# Altium PCB Side_PCB.PcbDoc
Units mil, origin at the board's own origin, x right, y up, seen from the top; angles counter-clockwise.
Board outline 1345 x 800 mil, 2 copper layers (Top Layer, Bottom Layer); 3 components, 4 nets, 14 pads, 0 vias.
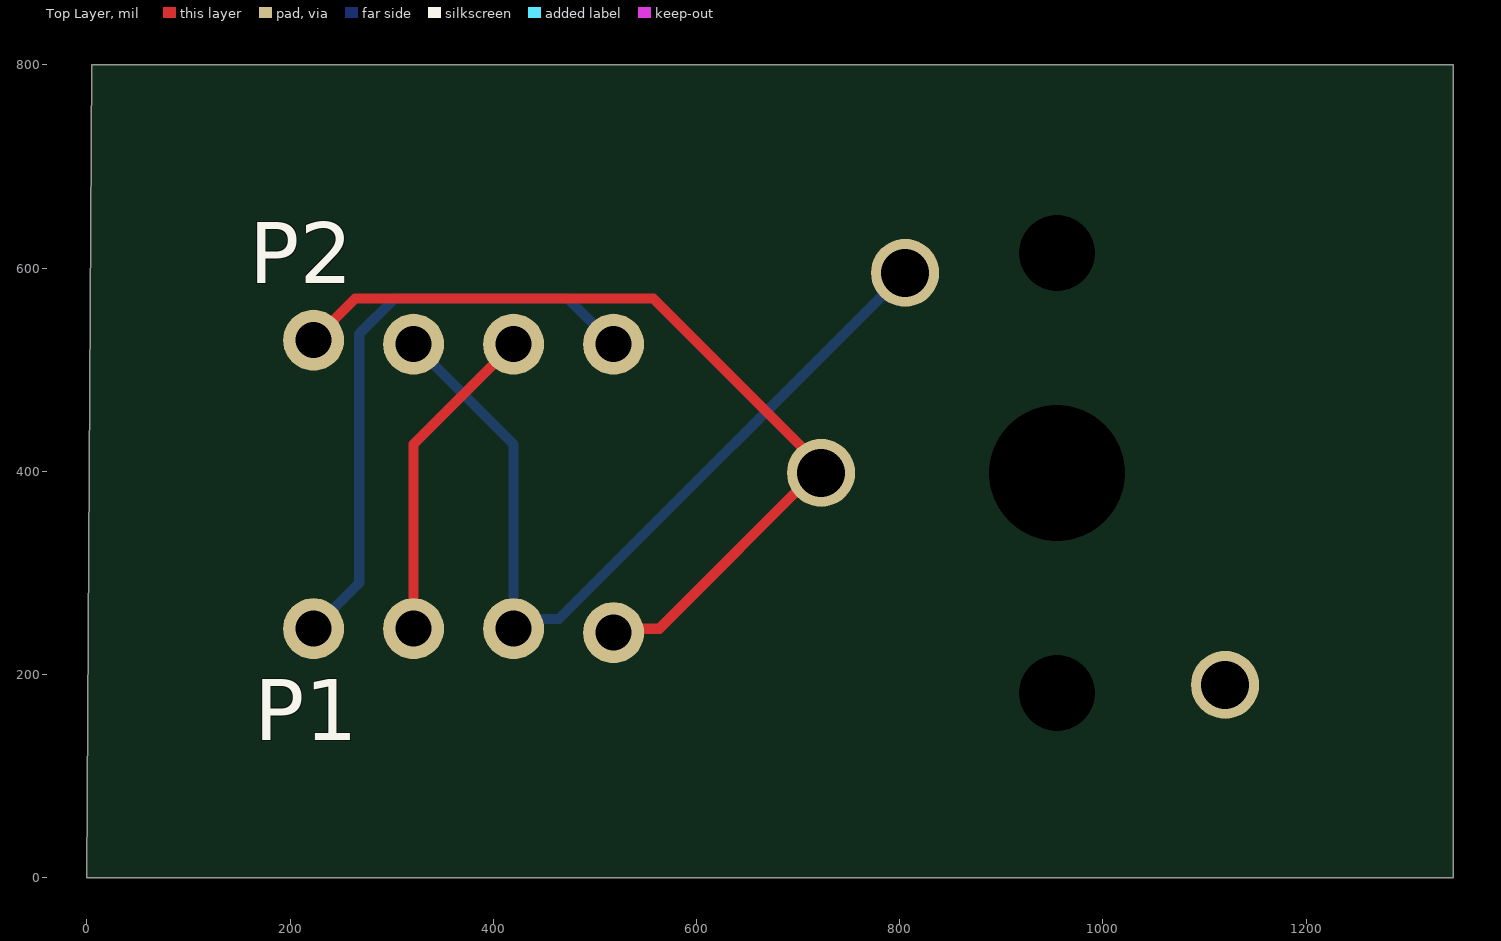
[diagram p0: Top Layer view]
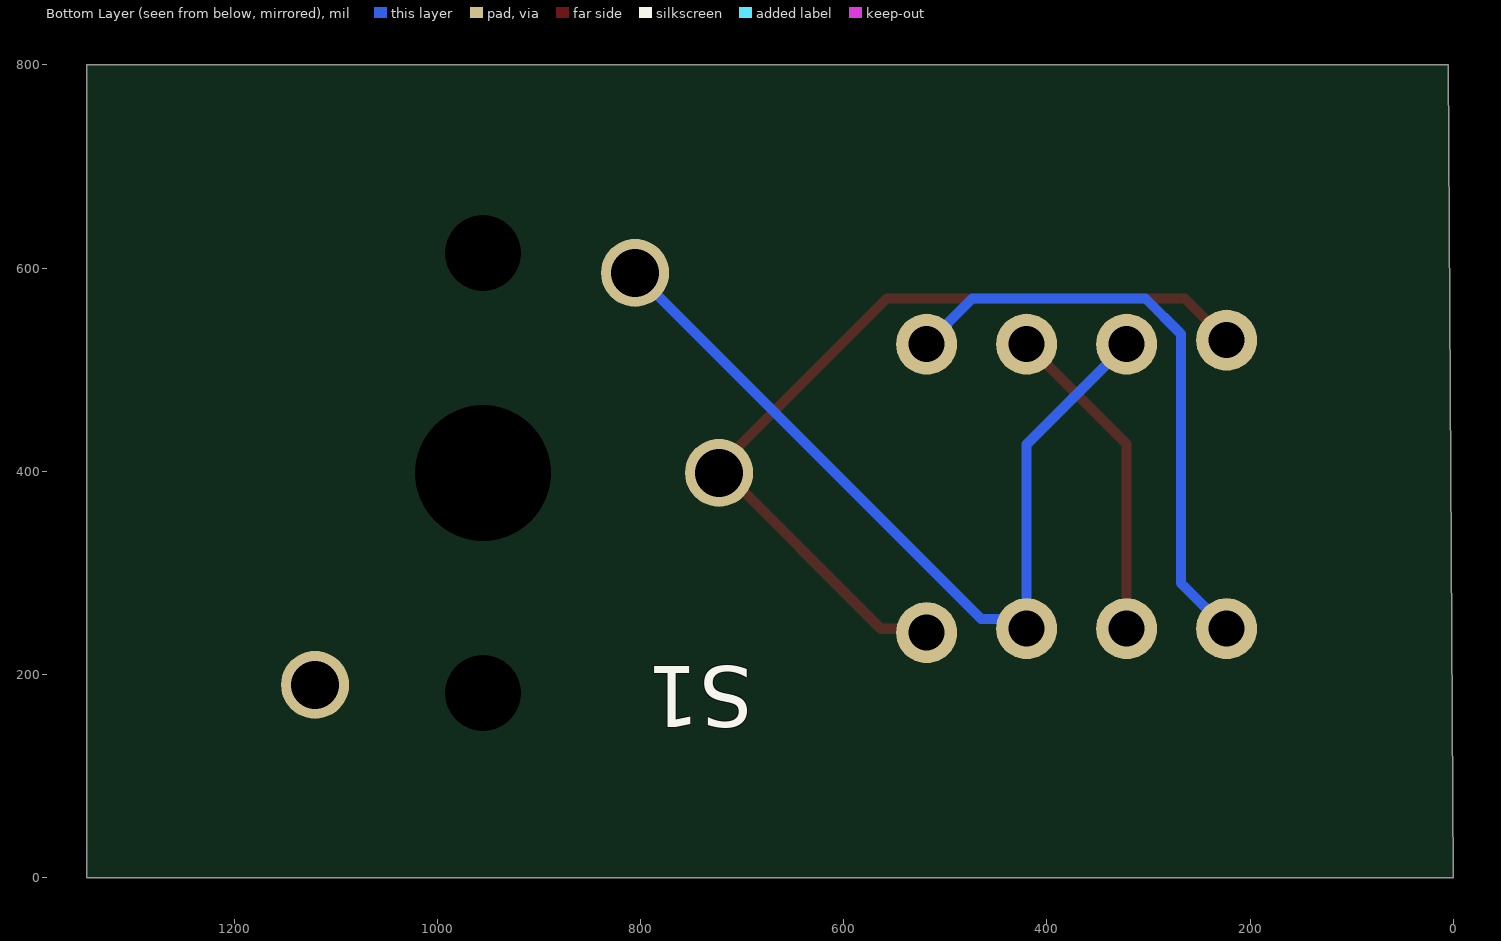
[diagram p1: Bottom Layer view, seen from below]

## Layer stack, top to bottom
Top Solder: solder mask 0.4, Solder Resist, Dk 3.5
Top Layer: signal copper 1.4
Dielectric 1: dielectric 12.6, FR-4, Dk 4.8
Bottom Layer: signal copper 1.4
Bottom Solder: solder mask 0.4, Solder Resist, Dk 3.5

## Board outline
5,800 1345,800 1345,0 0,0

## Design rules (kind name [scope] priority, off if disabled: settings)
Clearance [All] p1: gap=10 ignorepadtopadclearanceinfootprint=FALSE except(0: Arc-Hole Track-Hole SMDPad-Hole THPad-Hole Via-Hole Fill-Hole Poly-Hole Region-Hole Text-Hole)
PolygonConnect [All] p1: connectstyle=Relief reliefconductorwidth=10 reliefentries=4 polygonreliefangle="90 Angle" airgapwidth=10
RoomDefinition Side_PCB [InComponentClass('Side_PCB')] p1: confinementstyle=ConfineIn formatcopy=TRUE lockcomponents=FALSE outline 69.72,75 1259.72,75 1259.72,715 69.72,715
RoutingVias [All] p1: holewidth=28 width=50 viastyle="Through Hole" minholewidth=28 minwidth=50 maxholewidth=28 maxwidth=50
SolderMaskExpansion [All] p1: expansion=4
Width [All] p1: maxlimit=10 minlimit=10 preferedwidth=10
30 further rules are at their usual default settings.

## Components (designator, comment, footprint, x,y, rotation, side; value= is the part's Value field where it differs from the comment)
P1 "JST_SE_4PIN" JST_SE_4PIN 128.66,111.14 r0 top
P2 "JST_SE_4PIN" JST_SE_4PIN 612.91,658.86 r180 top
S1 "KAILH_LOW_PROFILE" KAILH_LOW_PROFILE 959.72,393.03 r0 bottom

## Footprints (in the part's own frame and the unit in brackets; to place one, negate y for a bottom-side part, rotate by r counter-clockwise, add the part's x,y. Pads: shape width x height; smd on the part's side, far side on the other; paste and mask are expansions set on the pad)
JST_SE_4PIN [mm]
  round 1.524 hole 0.9: 1(9.9,3.3) 2(7.4,3.4) 3(4.9,3.4) 4(2.4,3.4)
  body extent -0.01,0.05 12.27,5.72, height 7
KAILH_LOW_PROFILE [mm]
  round 1.7 hole 1.2: 0(-6.02,-0.138) 1(-3.92,-5.138) ""(4.08,5.162)
  round 1.524 hole 1.9: ""(-0.12,-5.638) ""(-0.12,5.362)
  round 1.524 hole 3.4: ""(-0.12,-0.138)
  body extent -7.82,-7.74 7.18,7.26, height 8

## Nets (pads, with @x,y where several pads share a name; then routed paths per layer and width w, separated by ;. In a path a pad name is that pad's centre, name@x,y a point inside that pad or via, vN(x,y) a via of type N, cw(c..) or ccw(c..) an arc to the next point about the centre after c; other vN are vias at no path point)
+3.3: P1.2 P2.2 S1.1 | length 851.3
  Bottom Layer w10: P2.2 420,426.57 P1.2 429.57,254.57 464.65,254.57 S1.1
GND: P1.4 P2.4 | length 592.2
  Bottom Layer w10: P1.4 268.15,290 268.15,535.21 302.94,570 473.43,570 P2.4
NetP1_1: P1.1 P2.1 S1.0 | length 857.7
  Top Layer w10: P2.1 264.21,570 557.56,570 722.99,404.57 563.43,245 522.36,245 P1.1
NetP1_3: P1.3 P2.3 | length 320.8
  Top Layer w10: P1.3 321.57,426.57 P2.3
pads on no net: S1.